# Allegro board caleidoscop1.brd
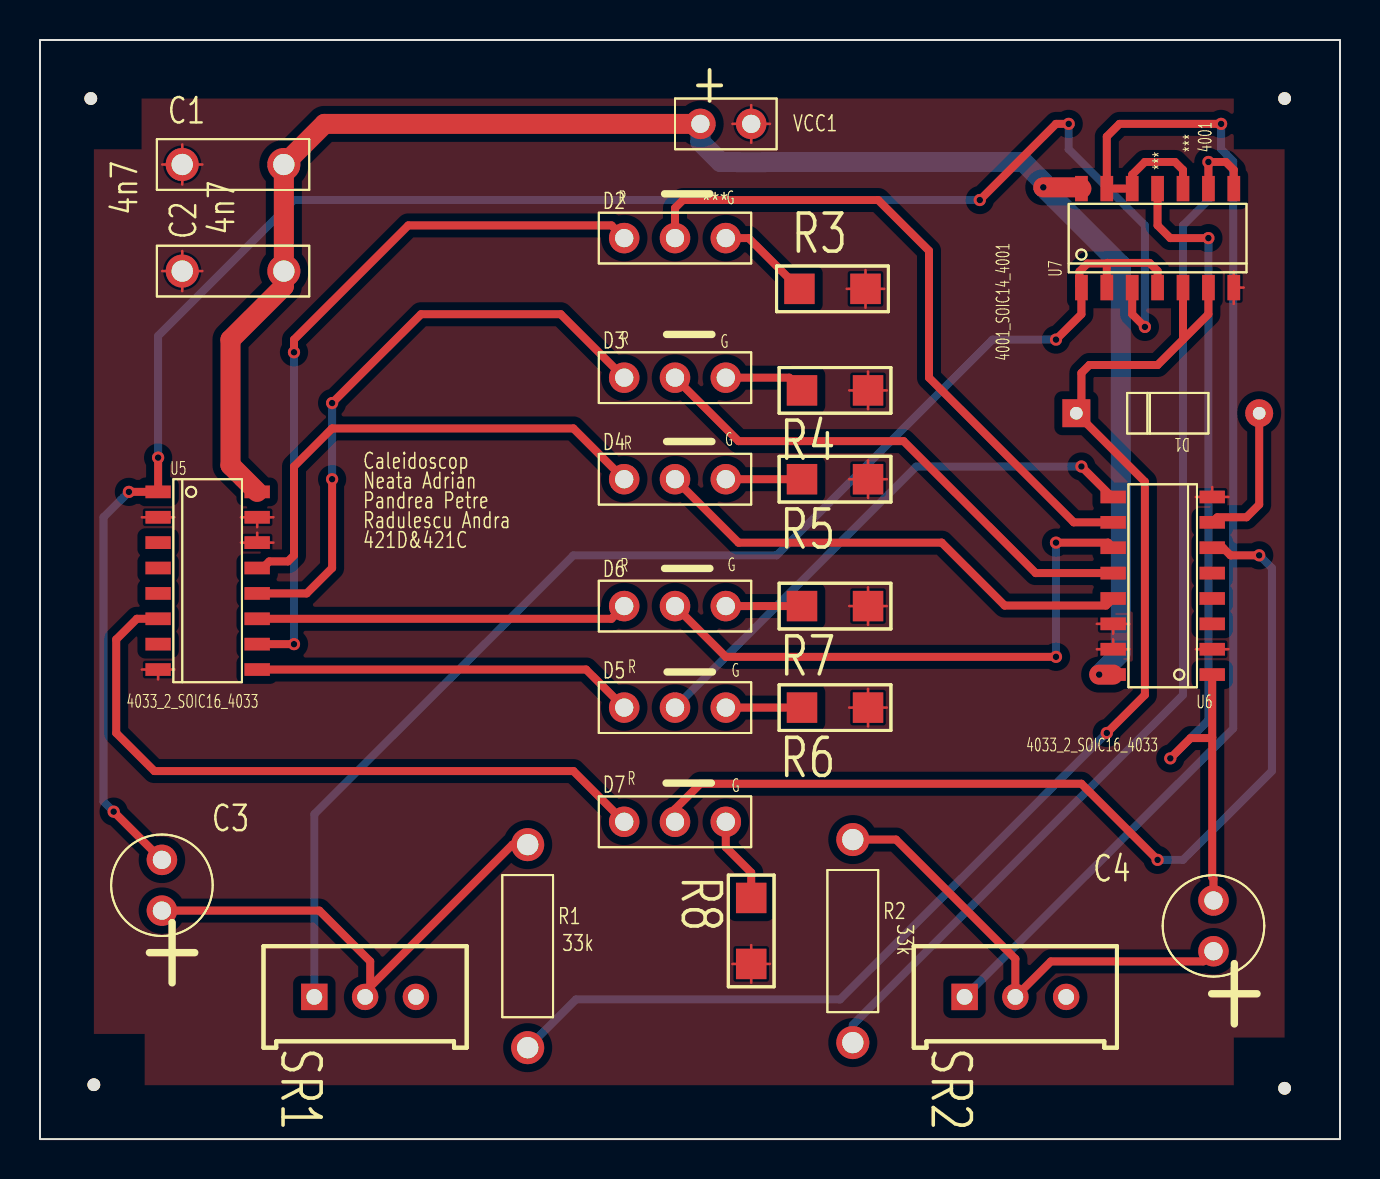
[diagram p0: board, top side]
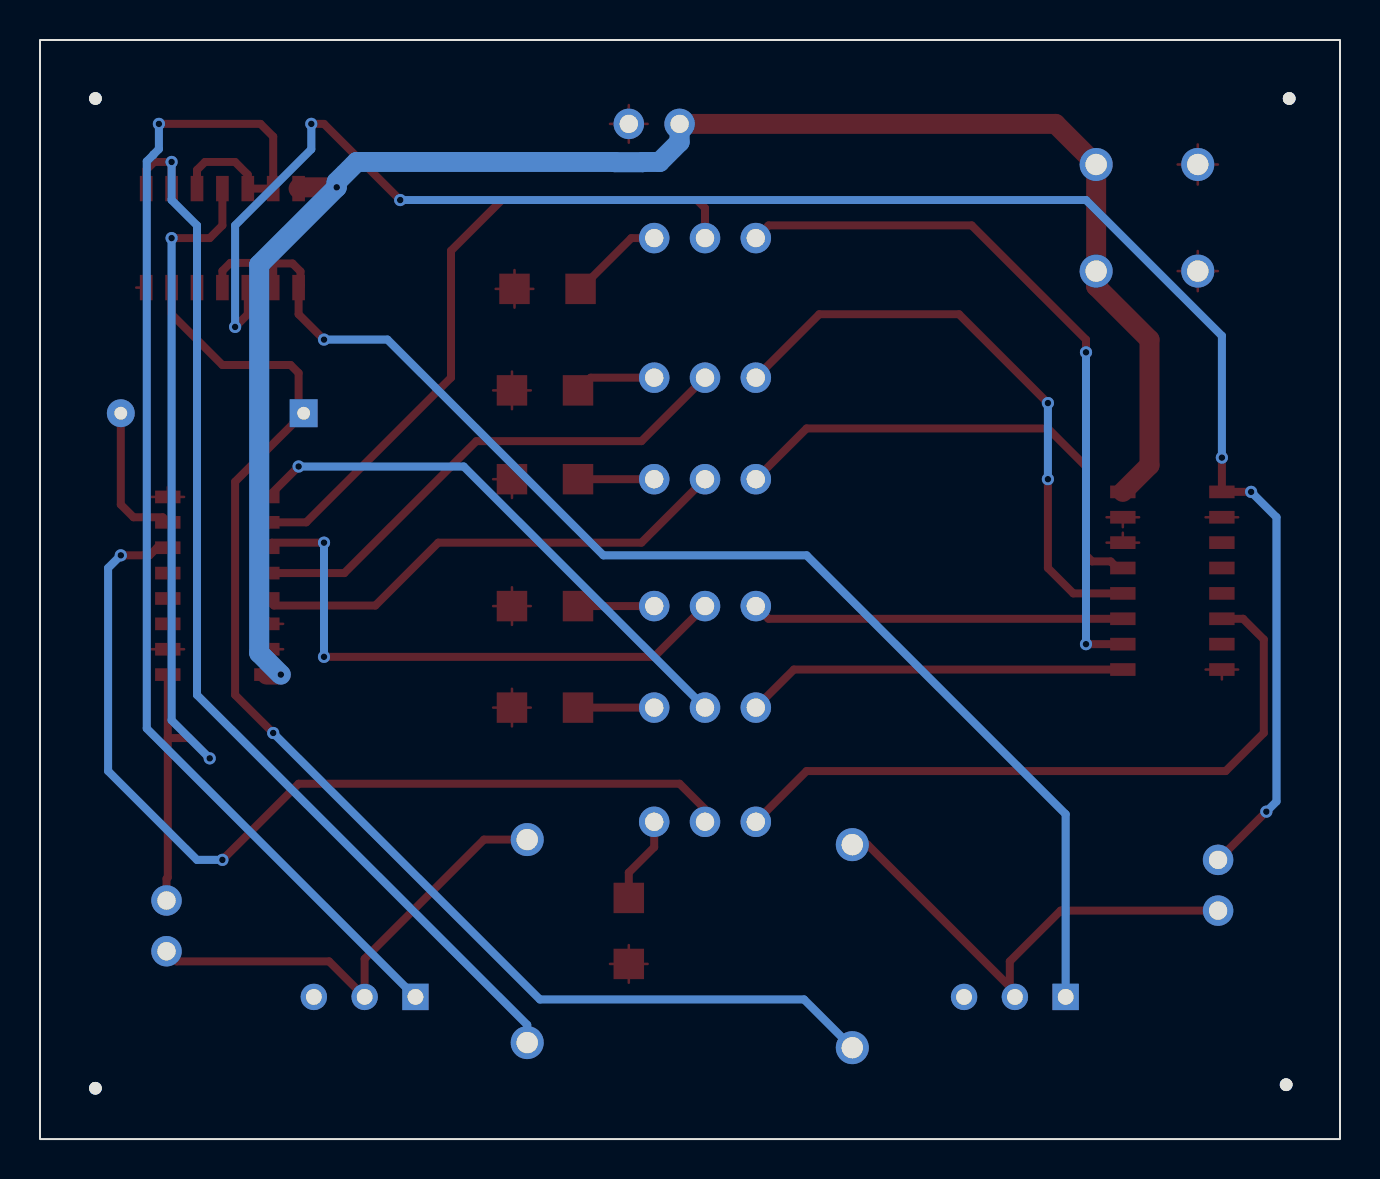
[diagram p1: board, bottom side, seen from below]

Outline 65 x 55 mm; copper layers: TOP, BOTTOM. Coordinates in mm from the lower left corner of the outline.
Outline path: rectangle 0,0 65,55

## Design rules (mm)
constraint set DEFAULT: min track width 0.127

## Placement (name value [footprint] x y rotation side)
C1  4n7  [CAPCK06]  12.19 48.77 90 top
C2  4n7  [CAPCK06]  12.19 43.43 90 top
C3  1u  [CAP196]  6.1 11.43 0 top
C4  1u  [CAP196]  58.67 9.4 0 top
D1  1N4148  [DO35]  51.82 36.32 270 top
D2  LED BI-COLOUR  [JUMPER3]  29.21 45.08 0 top
D3  LED BI-COLOUR  [JUMPER3]  29.21 38.1 0 top
D4  LED BI-COLOUR  [JUMPER3]  29.21 33.02 0 top
D5  LED BI-COLOUR  [JUMPER3]  29.21 21.59 0 top
D6  LED BI-COLOUR  [JUMPER3]  29.21 26.67 0 top
D7  LED BI-COLOUR  [JUMPER3]  29.21 15.88 0 top
NOREF  -  [unnamed]  62.23 52.07 0 top
NOREF#2  -  [unnamed]  2.54 52.07 0 top
NOREF#3  -  [#2]  0 55 0 top
NOREF#4  -  [#2]  65 0 90 top
NOREF#5  -  [unnamed]  62.23 2.54 0 top
NOREF#6  -  [unnamed]  2.69 2.72 0 top
R1  33k  [RES400]  24.38 4.57 0 top
R2  33k  [RES400]  40.64 4.83 0 top
R3  150  [SMR1206]  41.27 42.54 180 top
R4  150  [SMR1206]  38.1 37.47 0 top
R5  150  [SMR1206]  38.1 33.02 0 top
R6  150  [SMR1206]  38.1 21.59 0 top
R7  150  [SMR1206]  38.1 26.67 0 top
R8  150  [SMR1206]  35.56 12.06 270 top
SR1  100k  [VRES58]  13.72 7.11 0 top
SR2  100k  [VRES58]  46.23 7.11 0 top
U5  4033  [SOIC16]  8.38 27.94 0 top
U6  4033  [SOIC16]  56.13 27.69 180 top
U7  4001  [SOIC14]  55.88 45.08 90 top
VCC1  CON2  [JUMPER2]  33.02 50.8 0 top

## Library data of the parts
C1 C2 = CAP NP
C3 C4 = CAP POL
D1 = DIODE
D2 = LED BI-COLOUR_1: User Part Number: ***
D3-D7 = LED BI-COLOUR_1
R1-R8 = R
SR1 SR2 = POT
U5 = 4033_2
U6 = 4033_2: Tolerance: ***; User Part Number: ***
U7 = 4001: Tolerance: ***; User Part Number: ***
VCC1 = CON2: User Part Number: ***

## Footprints (pads in the part's own frame, mm; a bottom-side part is the same pattern mirrored in y, then rotated)
CAP196
  round 1.524 hole 0.914: 1(0,0) 2(0,2.54)
CAPCK06
  round 1.651 hole 1.067: 1(0,0) 2(0,5.08)
DO35
  rect 1.397x1.397 hole 0.635: 1(0,0)
  round 1.397 hole 0.635: 2(0,9.144)
JUMPER2
  round 1.524 hole 0.914: 1(0,0) 2(2.54,0)
JUMPER3
  round 1.524 hole 0.914: 1(0,0) 2(2.54,0) 3(5.08,0)
RES400
  round 1.651 hole 1.067: 1(0,0) 2(0,10.16)
SMR1206
  rect 1.524x1.524 smd: 1(0,0) 2(3.302,0)
SOIC14
  rect 1.27x0.635 smd: 1(-2.477,3.81) 2(-2.477,2.54) 3(-2.477,1.27) 4(-2.477,0) 5(-2.477,-1.27) 6(-2.477,-2.54) 7(-2.477,-3.81) 8(2.477,-3.81) 9(2.477,-2.54) 10(2.477,-1.27) 11(2.477,0) 12(2.477,1.27) 13(2.477,2.54) 14(2.477,3.81)
SOIC16
  rect 1.27x0.635 smd: 1(-2.477,4.445) 2(-2.477,3.175) 3(-2.477,1.905) 4(-2.477,0.635) 5(-2.477,-0.635) 6(-2.477,-1.905) 7(-2.477,-3.175) 8(-2.477,-4.445) 9(2.477,-4.445) 10(2.477,-3.175) 11(2.477,-1.905) 12(2.477,-0.635) 13(2.477,0.635) 14(2.477,1.905) 15(2.477,3.175) 16(2.477,4.445)
unnamed
  round 0.635 hole 3.175 unplated: (0,0)
VRES58
  rect 1.321x1.321 hole 0.787: 1(0,0)
  round 1.321 hole 0.787: 2(2.54,0) 3(5.08,0)

## Nets
+9V: C1.1 C2.1 U5.16(VCC) U6.16(VCC) U7.14 VCC1.1
GND: C1.2 C2.2 R3.1 R4.2 R5.2 R6.2 R7.2 R8.2 U5.2 U5.8 U5.14 U5.15 U6.2 U6.8 U6.14 U6.15 U7.7 VCC1.2
N04758: SR1.1 U7.1 U7.2 U7.4
N05153: C3.1 R1.2 SR1.2(WIPER)
N07928: D1.2 U6.7
N09153: C3.2 U5.1 U7.3
N09380: C4.2 U6.1 U7.11(O)
N09448: C4.1 R2.2 SR2.2(WIPER)
N10890: D7.2 U6.6
N10905: D4.2 U6.13
N10928: D2.2 U6.10
N10992: D3.2 U6.12
N15766: D4.1 U5.13
N17402: D5.2 U6.9
N17408: D6.2 U6.11
N18189: D1.1(K) R1.1 U7.5 U7.6
N23206: R2.1 U7.8 U7.9
N27043: D2.1 U5.10
N29756: D5.1 U5.9
N29910: D6.1 U5.11
N29955: D7.1 U5.6
N31126: D3.1 U5.12
N35604: SR2.1 U7.10 U7.12 U7.13
N134251: D2.3(CATHODE) R3.2
N137160: D3.3(CATHODE) R4.1
N138190: D4.3(CATHODE) R5.1
N139250: D5.3(CATHODE) R6.1
N140280: D6.3(CATHODE) R7.1
N141330: D7.3(CATHODE) R8.1

Pads without a net: SR1 3; SR2 3; U5 3 4 5 7; U6 3 4 5

## Via types
v1: diameter 0.61, hole 0.33, TOP to BOTTOM, 23 vias

## Routing (per net, layer and track width the routed paths; a pad name or vN(x,y) marks a point on that pad's centre or on a via; arc(x,y) is an arc through that point)
+9V: length 87.9
  TOP w1: U7.14 52.01,47.62 v1(50.16,47.62) ; VCC1.1 14.22,50.8 C1.1 C2.1 12.19,42.67 9.52,40 9.52,33.72 U5.16 ; U6.16 v1(52.96,23.24)
  BOTTOM w1: VCC1.1 33.02,49.89 34.02,48.89 34.86,48.89 34.87,48.88 36.25,48.88 36.26,48.89 49.17,48.89 50.16,47.9 v1(50.16,47.62) 54.04,43.75 54.04,24.32 v1(52.96,23.24)
GND: length 52.5
  TOP w0.127: 58.61,32.13 59.42,32.13 ; 58.61,32.13 58.61,32.63 ; 58.61,32.13 57.8,32.13 ; 7.11,47.76 C1.2 ; C1.2 6.11,48.77 ; C1.2 8.12,48.77 ; C1.2 7.11,49.77 ; 7.11,42.43 C2.2 ; C2.2 8.12,43.43 ; C2.2 7.11,44.44 ; C2.2 6.11,43.43 ; 34.62,50.8 VCC1.2 ; VCC1.2 35.56,51.74 ; VCC1.2 36.5,50.8 ; VCC1.2 35.56,49.86 ; 5.09,23.5 U5.8 ; U5.8 6.72,23.5 ; U5.8 5.91,23 ; 57.8,24.51 59.42,24.51 ; U7.7 59.69,43.42 ; U7.7 60.19,42.61 ; U7.7 59.69,41.8 ; 5.09,31.11 U5.2 6.72,31.11 ; R3.1 42.22,42.54 ; R3.1 41.27,41.6 ; R3.1 40.33,42.54 ; R3.1 41.27,43.49 ; R5.2 41.4,33.96 ; R5.2 42.34,33.02 ; R5.2 41.4,32.08 ; R5.2 40.46,33.02 ; 53.66,24.51 54.47,24.51 ; 53.66,24.51 52.84,24.51 ; 53.66,24.51 53.66,25.01 ; R7.2 42.34,26.67 ; R7.2 41.4,27.61 ; R7.2 41.4,25.73 ; R7.2 40.46,26.67 ; 52.84,25.78 U6.14 ; U6.14 53.66,25.29 ; U6.14 54.47,25.78 ; 10.05,29.84 U5.14 ; U5.14 11.67,29.84 ; U5.14 10.86,30.34 ; 40.46,21.59 R6.2 ; R6.2 42.34,21.59 ; R6.2 41.4,20.65 ; R6.2 41.4,22.53 ; 10.86,30.62 U5.15 ; U5.15 10.05,31.11 ; U5.15 11.67,31.11 ; R8.2 35.56,9.7 ; R8.2 36.5,8.76 ; R8.2 34.62,8.76 ; R8.2 35.56,7.82 ; R4.2 41.4,38.41 ; R4.2 42.34,37.47 ; R4.2 40.46,37.47 ; R4.2 41.4,36.52
N04758: length 66.3
  TOP w0.4: U7.4 55.88,43.44 55.48,43.84 53.37,43.84 53.34,43.81 ; 53.34,43.81 U7.2 ; 53.34,43.81 52.37,43.81 51.97,43.41 51.97,42.7 U7.1 52.07,41.28 v1(50.8,40)
  BOTTOM w0.4: v1(50.8,40) 47.62,40 36.83,29.21 26.67,29.21 13.72,16.26 SR1.1
N05153: length 24.2
  TOP w0.4: 16.51,7.62 23.62,14.73 R1.2 ; 16.51,7.62 16.51,8.89 13.97,11.43 C3.1 ; 16.51,7.62 16.51,7.37 SR1.2
N07928: length 7.3
  TOP w0.4: U6.7 58.86,31.11 60.33,31.11 60.96,31.75 D1.2
N09153: length 93.3
  TOP w0.4: C3.2 v1(3.68,16.38) ; v1(55.25,40.64) 54.61,41.28 U7.3 ; v1(5.91,34.1) U5.1 v1(4.44,32.38) ; v1(51.44,50.8) 50.8,50.8 v1(46.99,46.99)
  BOTTOM w0.4: v1(5.91,34.1) 5.91,40.2 12.7,46.99 v1(46.99,46.99) ; v1(4.44,32.38) 3.17,31.11 3.17,16.89 v1(3.68,16.38) ; v1(55.25,40.64) 55.25,45.72 51.44,49.53 v1(51.44,50.8)
N09380: length 45.3
  TOP w0.4: U7.11 55.88,45.72 56.51,45.08 v1(58.42,45.08) ; v1(56.51,19.05) 57.53,20.07 58.59,20.07 58.61,20.09 ; 58.61,20.09 U6.1 ; 58.61,20.09 58.61,13.09 58.67,13.03 C4.2
  BOTTOM w0.4: v1(58.42,45.08) 58.42,20.95 v1(56.51,19.05)
N09448: length 23.4
  TOP w0.4: C4.1 58.17,8.89 50.55,8.89 SR2.2 48.77,9.02 42.8,14.99 R2.2
N10890: length 48
  TOP w0.4: v1(55.88,13.97) 52.07,17.78 33.02,17.78 31.75,16.51 D7.2 ; U6.6 59.14,29.59 59.52,29.21 v1(60.96,29.21)
  BOTTOM w0.4: v1(60.96,29.21) 61.59,28.57 61.59,18.41 57.15,13.97 v1(55.88,13.97)
N10905: length 24.7
  TOP w0.4: U6.13 53.31,26.7 48.23,26.7 45.08,29.84 34.92,29.84 D4.2
N10928: length 34
  TOP w0.4: D2.2 31.75,46.59 32.15,46.99 41.91,46.99 44.45,44.45 44.45,38.1 51.69,30.86 U6.10
N10992: length 26
  TOP w0.4: D3.2 34.92,34.92 43.18,34.92 49.78,28.32 U6.12
N15766: length 24.9
  TOP w0.4: U5.13 11.14,28.57 11.47,28.91 12.4,28.91 12.7,29.21 12.7,33.65 14.61,35.56 26.67,35.56 D4.1
N17402: length 27.5
  TOP w0.4: 53.66,32.13 53.59,32.13 v1(52.07,33.66)
  BOTTOM w0.4: v1(52.07,33.66) 43.81,33.66 D5.2
N17408: length 28.8
  TOP w0.4: U6.11 53.4,29.84 v1(50.8,29.84) ; v1(50.8,24.13) 34.29,24.13 D6.2
  BOTTOM w0.4: v1(50.8,24.13) v1(50.8,29.84)
N18189: length 67.3
  TOP w0.4: 57.15,40 58.42,41.28 U7.6 ; 57.15,40 U7.5 ; 57.15,40 55.88,38.73 52.47,38.73 52.07,38.33 52.07,36.58 D1.1 55.25,32.89 55.25,22.22 v1(53.34,20.32)
  BOTTOM w0.4: v1(53.34,20.32) 40,6.98 26.8,6.98 R1.1
N23206: length 55.1
  TOP w0.4: U7.9 v1(58.42,48.89) 59.29,48.89 59.69,48.49 U7.8
  BOTTOM w0.4: v1(58.42,48.89) 58.42,46.99 57.15,45.72 57.15,22.22 40.64,5.72 R2.1
N27043: length 36.2
  TOP w0.4: v1(12.7,39.37) 12.7,40 18.41,45.72 28.57,45.72 D2.1 ; U5.10 v1(12.7,24.76)
  BOTTOM w0.4: v1(12.7,39.37) v1(12.7,24.76)
N29756: length 19.1
  TOP w0.4: D5.1 27.3,23.5 U5.9
N29910: length 18.6
  TOP w0.4: U5.11 28.57,26.03 D6.1
N29955: length 34.4
  TOP w0.4: D7.1 26.67,18.41 5.71,18.41 3.81,20.32 3.81,25 4.85,26.03 U5.6
N31126: length 30.3
  TOP w0.4: v1(14.6,33.02) 14.6,28.58 13.33,27.3 10.86,27.3 ; v1(14.6,36.83) 19.05,41.28 26.03,41.28 D3.1
  BOTTOM w0.4: v1(14.6,33.02) v1(14.6,36.83)
N35604: length 64
  TOP w0.4: U7.10 57.15,48.49 56.75,48.89 55.25,48.89 54.61,48.26 U7.12 U7.13 53.34,50.16 53.97,50.8 v1(59.05,50.8)
  BOTTOM w0.4: v1(59.05,50.8) 59.05,49.54 59.33,49.27 59.33,49.26 59.66,48.92 59.66,20.55 SR2.1
N134251: length 4.7
  TOP w0.4: D2.3 35.43,45.08 R3.2
N137160: length 4.1
  TOP w0.4: R4.1 37.46,38.1 D3.3
N138190: length 3.8
  TOP w0.4: D4.3 R5.1
N139250: length 3.8
  TOP w0.4: D5.3 R6.1
N140280: length 3.8
  TOP w0.4: D6.3 R7.1
N141330: length 4.3
  TOP w0.4: R8.1 35.56,13.33 34.29,14.6 D7.3

## Copper pours and planes (outline as drawn; the poured copper is in the pictures)
GND on TOP: 2.69,2.69 2.69,52.07 62.23,52.07 62.23,2.69

## Text on the board
Ref Des/Silkscreen Top: R | G | Caleidoscop | Neata Adrian | Pandrea Petre | Radulescu Andra | 421D&421C | + | -
XSECTION_CHART: *  SURFACE | L1 TOP CONDUCTOR | *  DIELECTRIC | L2 BOTTOM CONDUCTOR | DESIGN CROSS SECTION CHART | ___________________________ | TOTAL THICKNESS 10.4 MIL | 1-2
DIMENSION: FIGURE | FINISHED_SIZE | 13.0 | 25.0 | 31.0 | 36.0 | 42.0 | 125.0 | DRILL CHART: TOP to BOTTOM | ALL UNITS ARE IN MILS | PLATED | NON-PLATED | QTY | 23 | 2 | 6 | 24 | 8 | 4
